# Altium PCB PCB1.PcbDoc
Units mm, origin at the board's own origin, x right, y up, seen from the top; angles counter-clockwise.
Board outline 60 x 60 mm, 4 copper layers (Top Layer 1, Layer 1, Layer 2, Bottom Layer 1), stack 0.603 mm thick; 63 components, 62 nets, 347 pads, 4 vias.
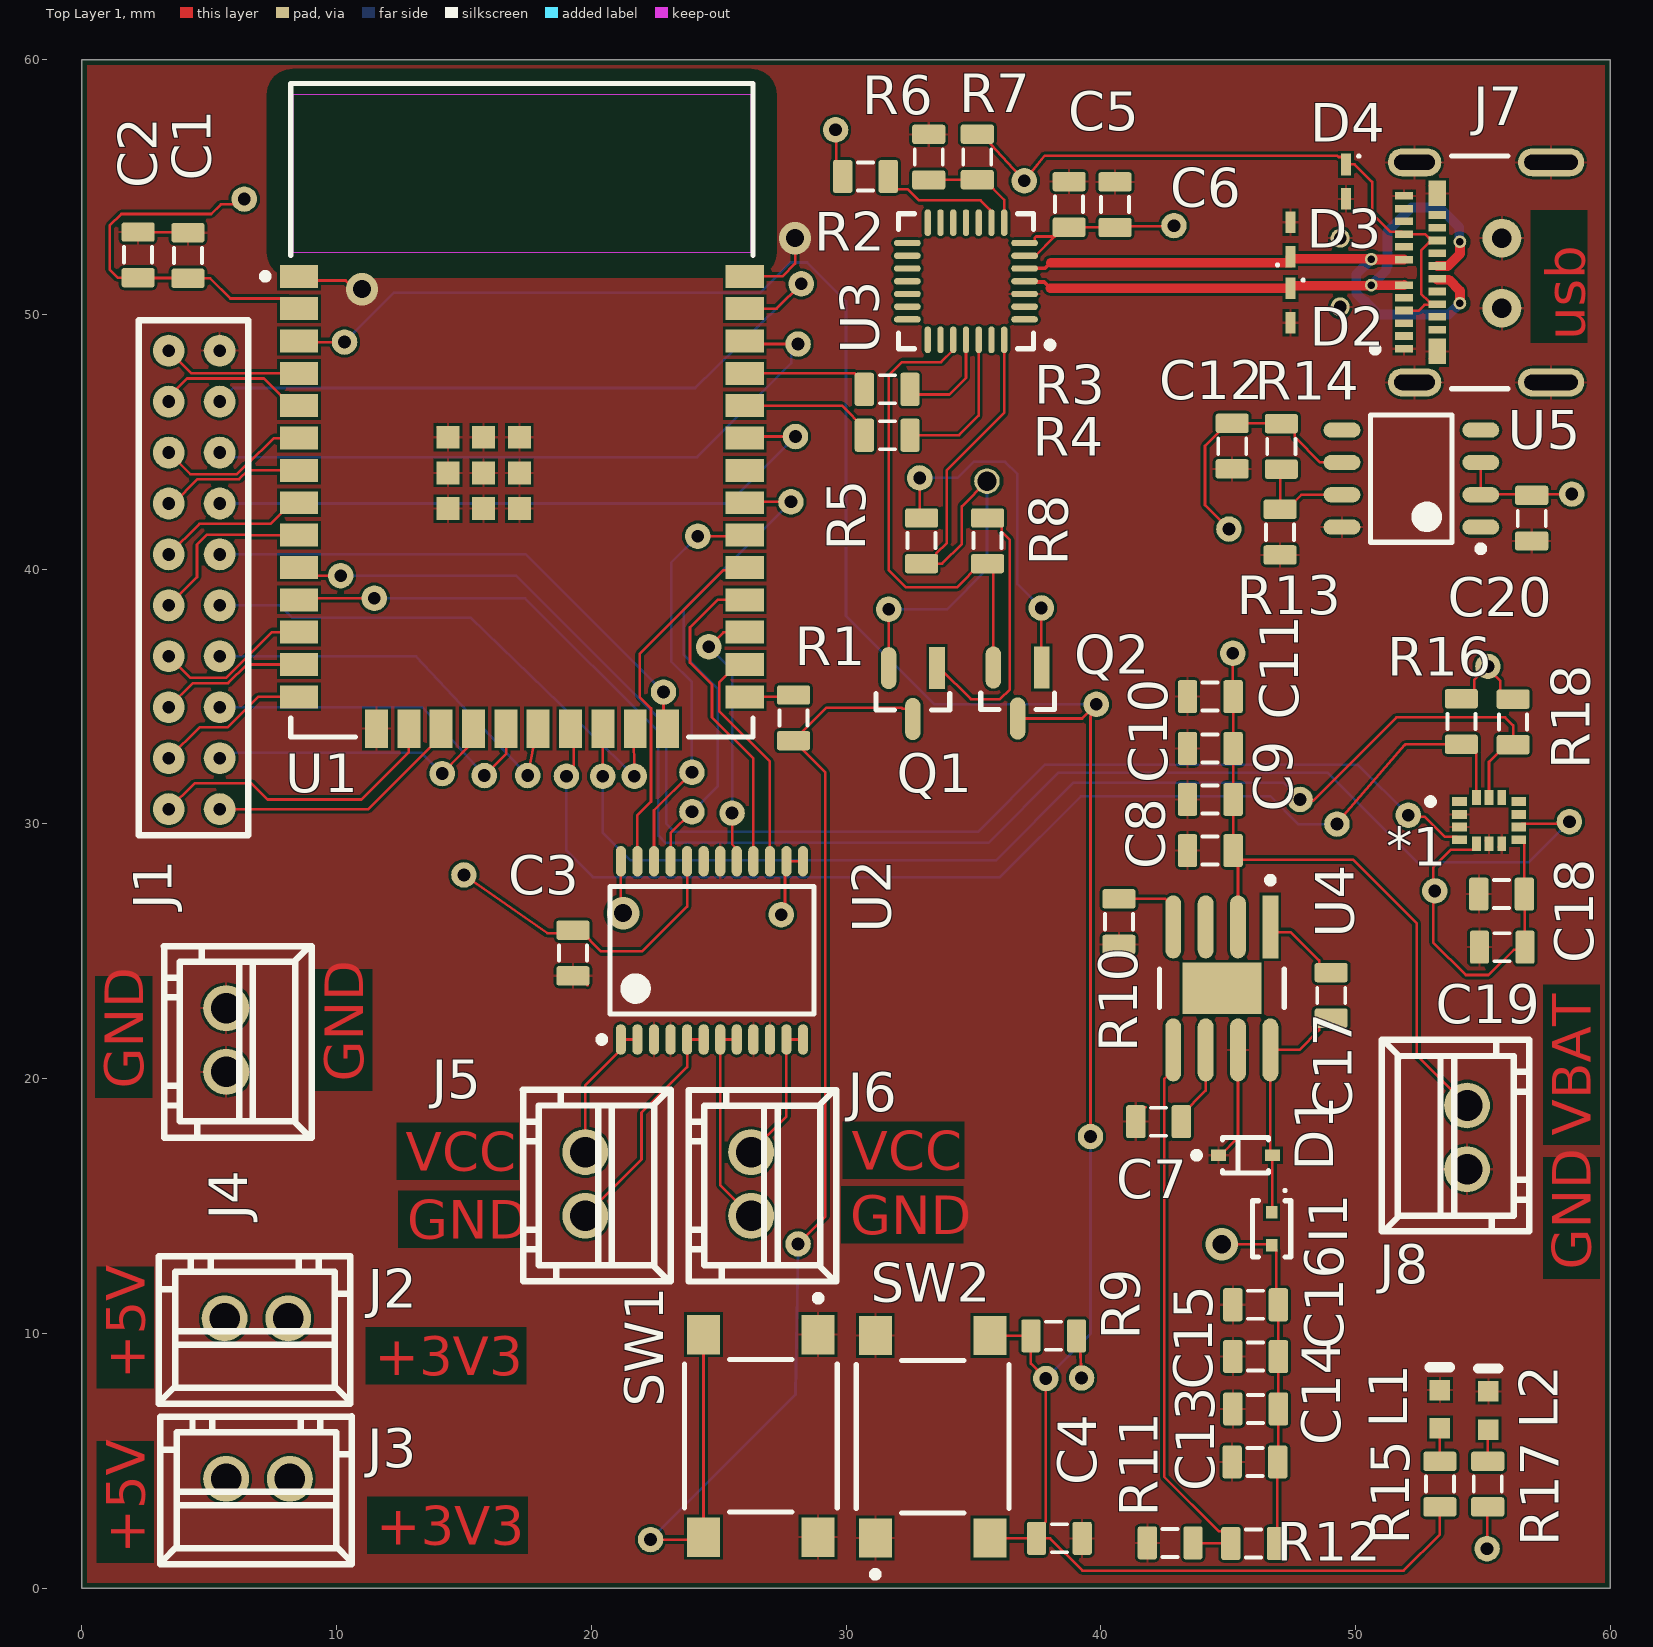
[diagram p0: Top Layer 1 view]
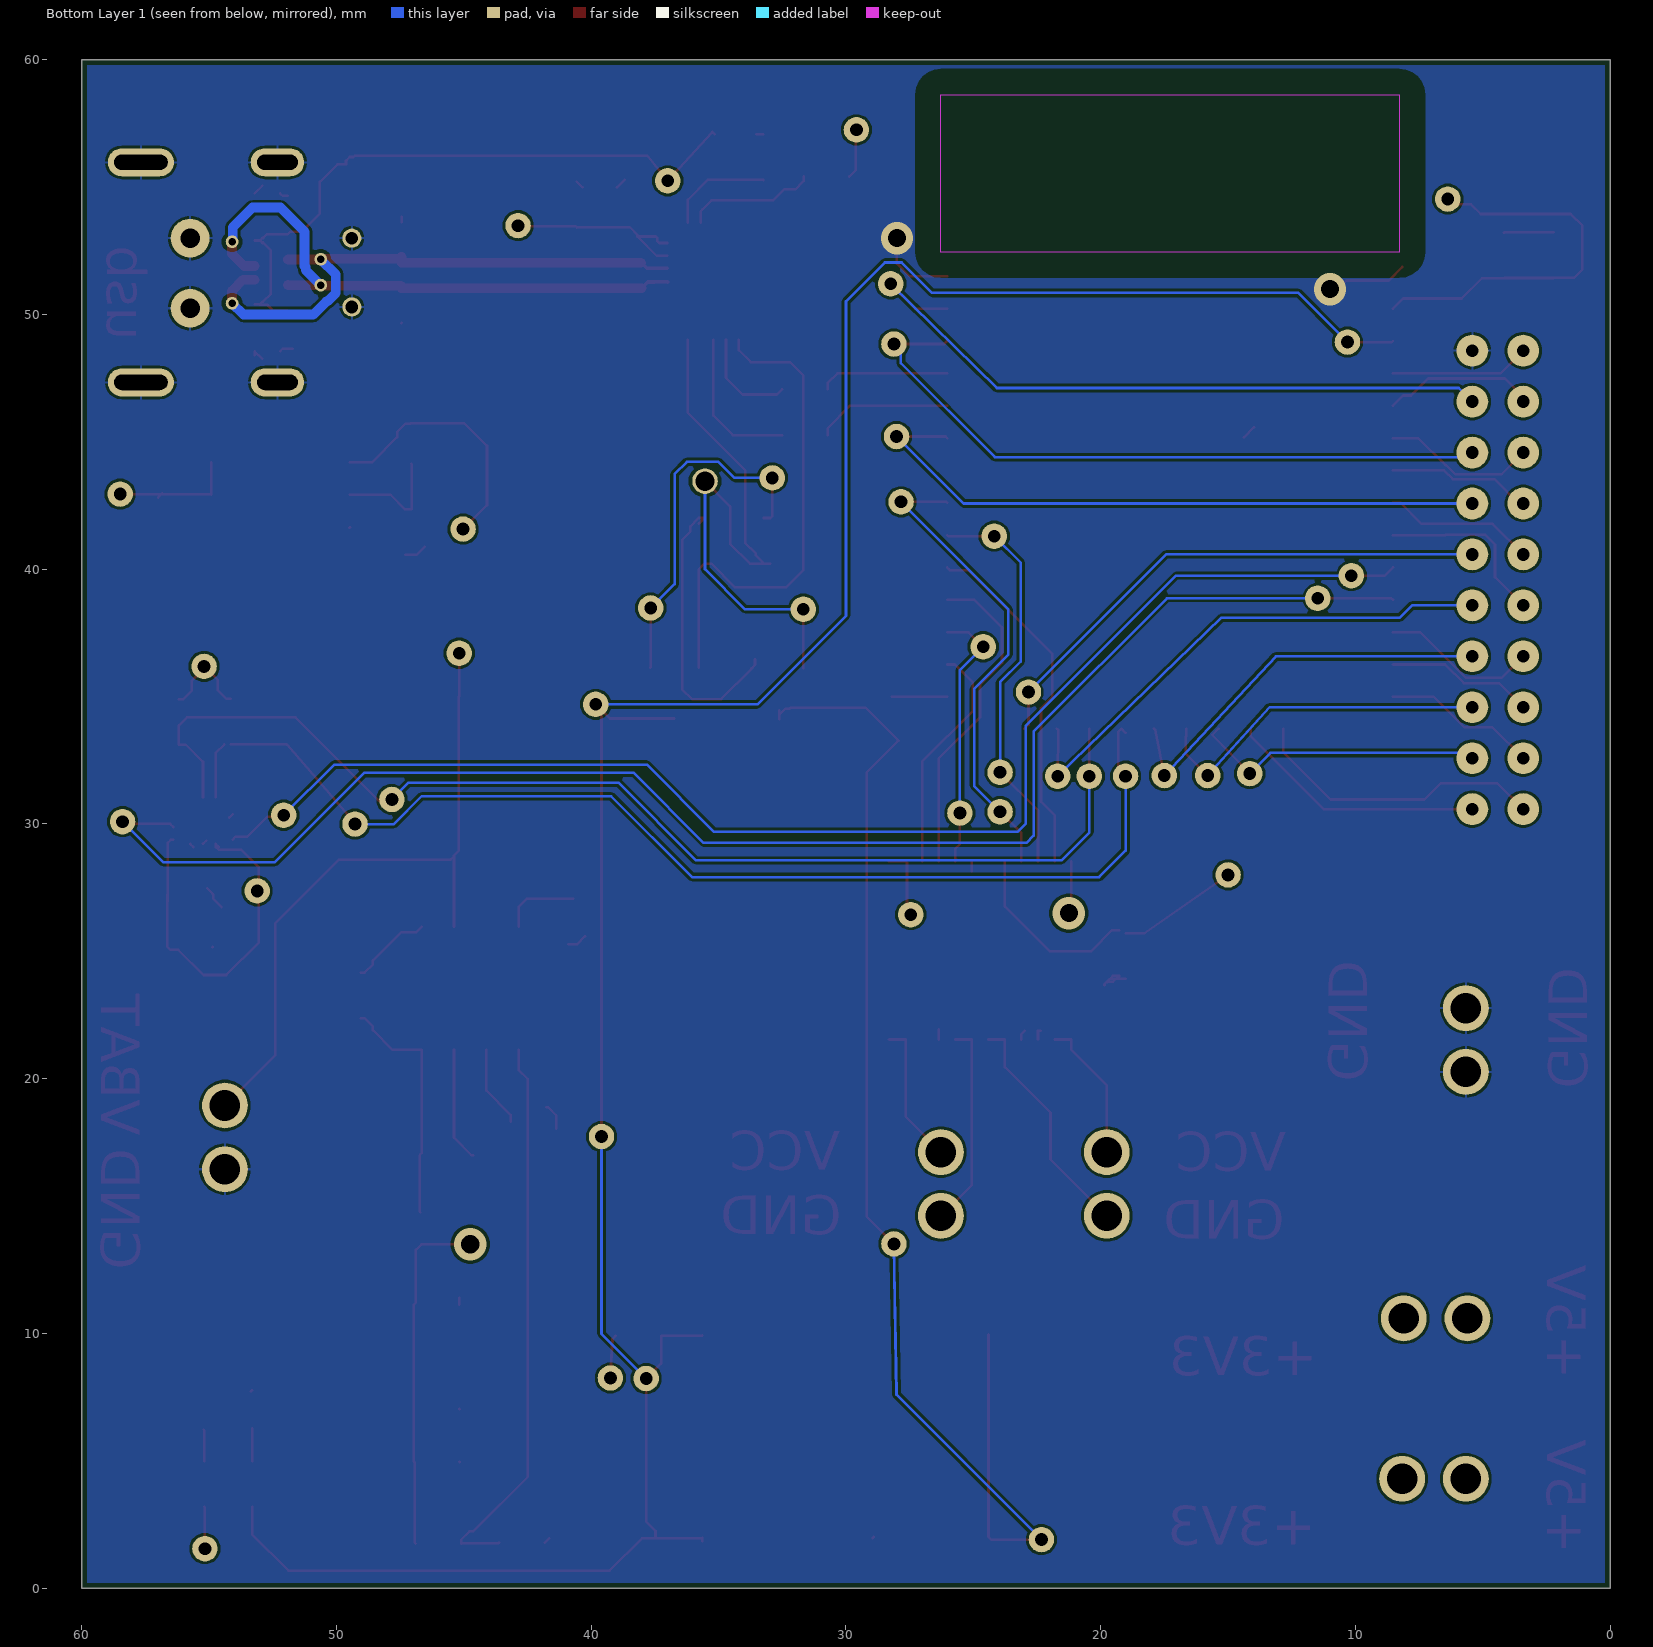
[diagram p1: Bottom Layer 1 view, seen from below]
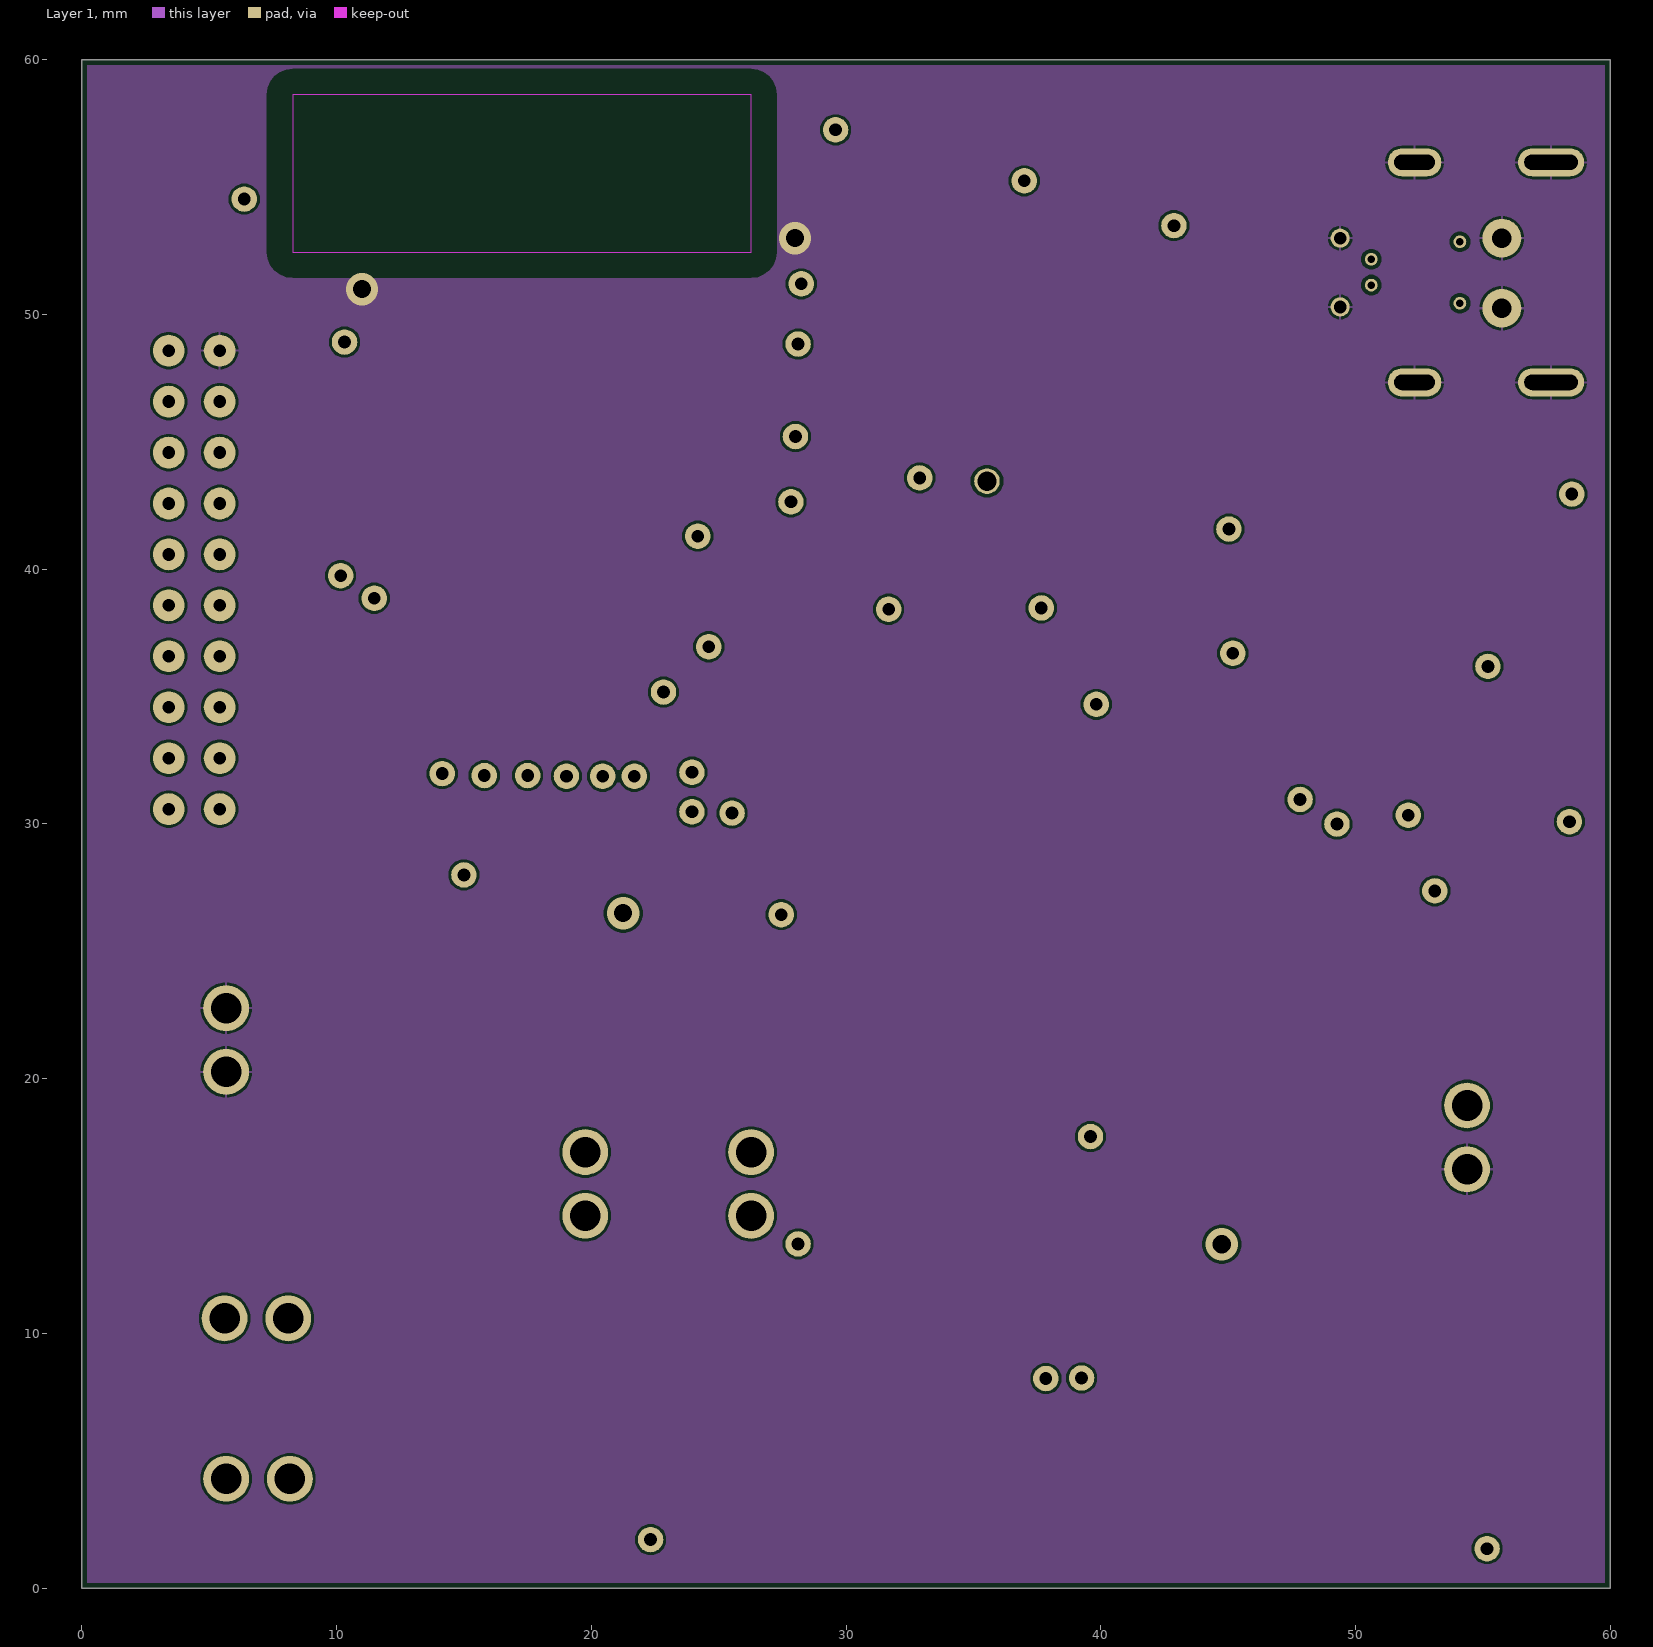
[diagram p2: Layer 1]
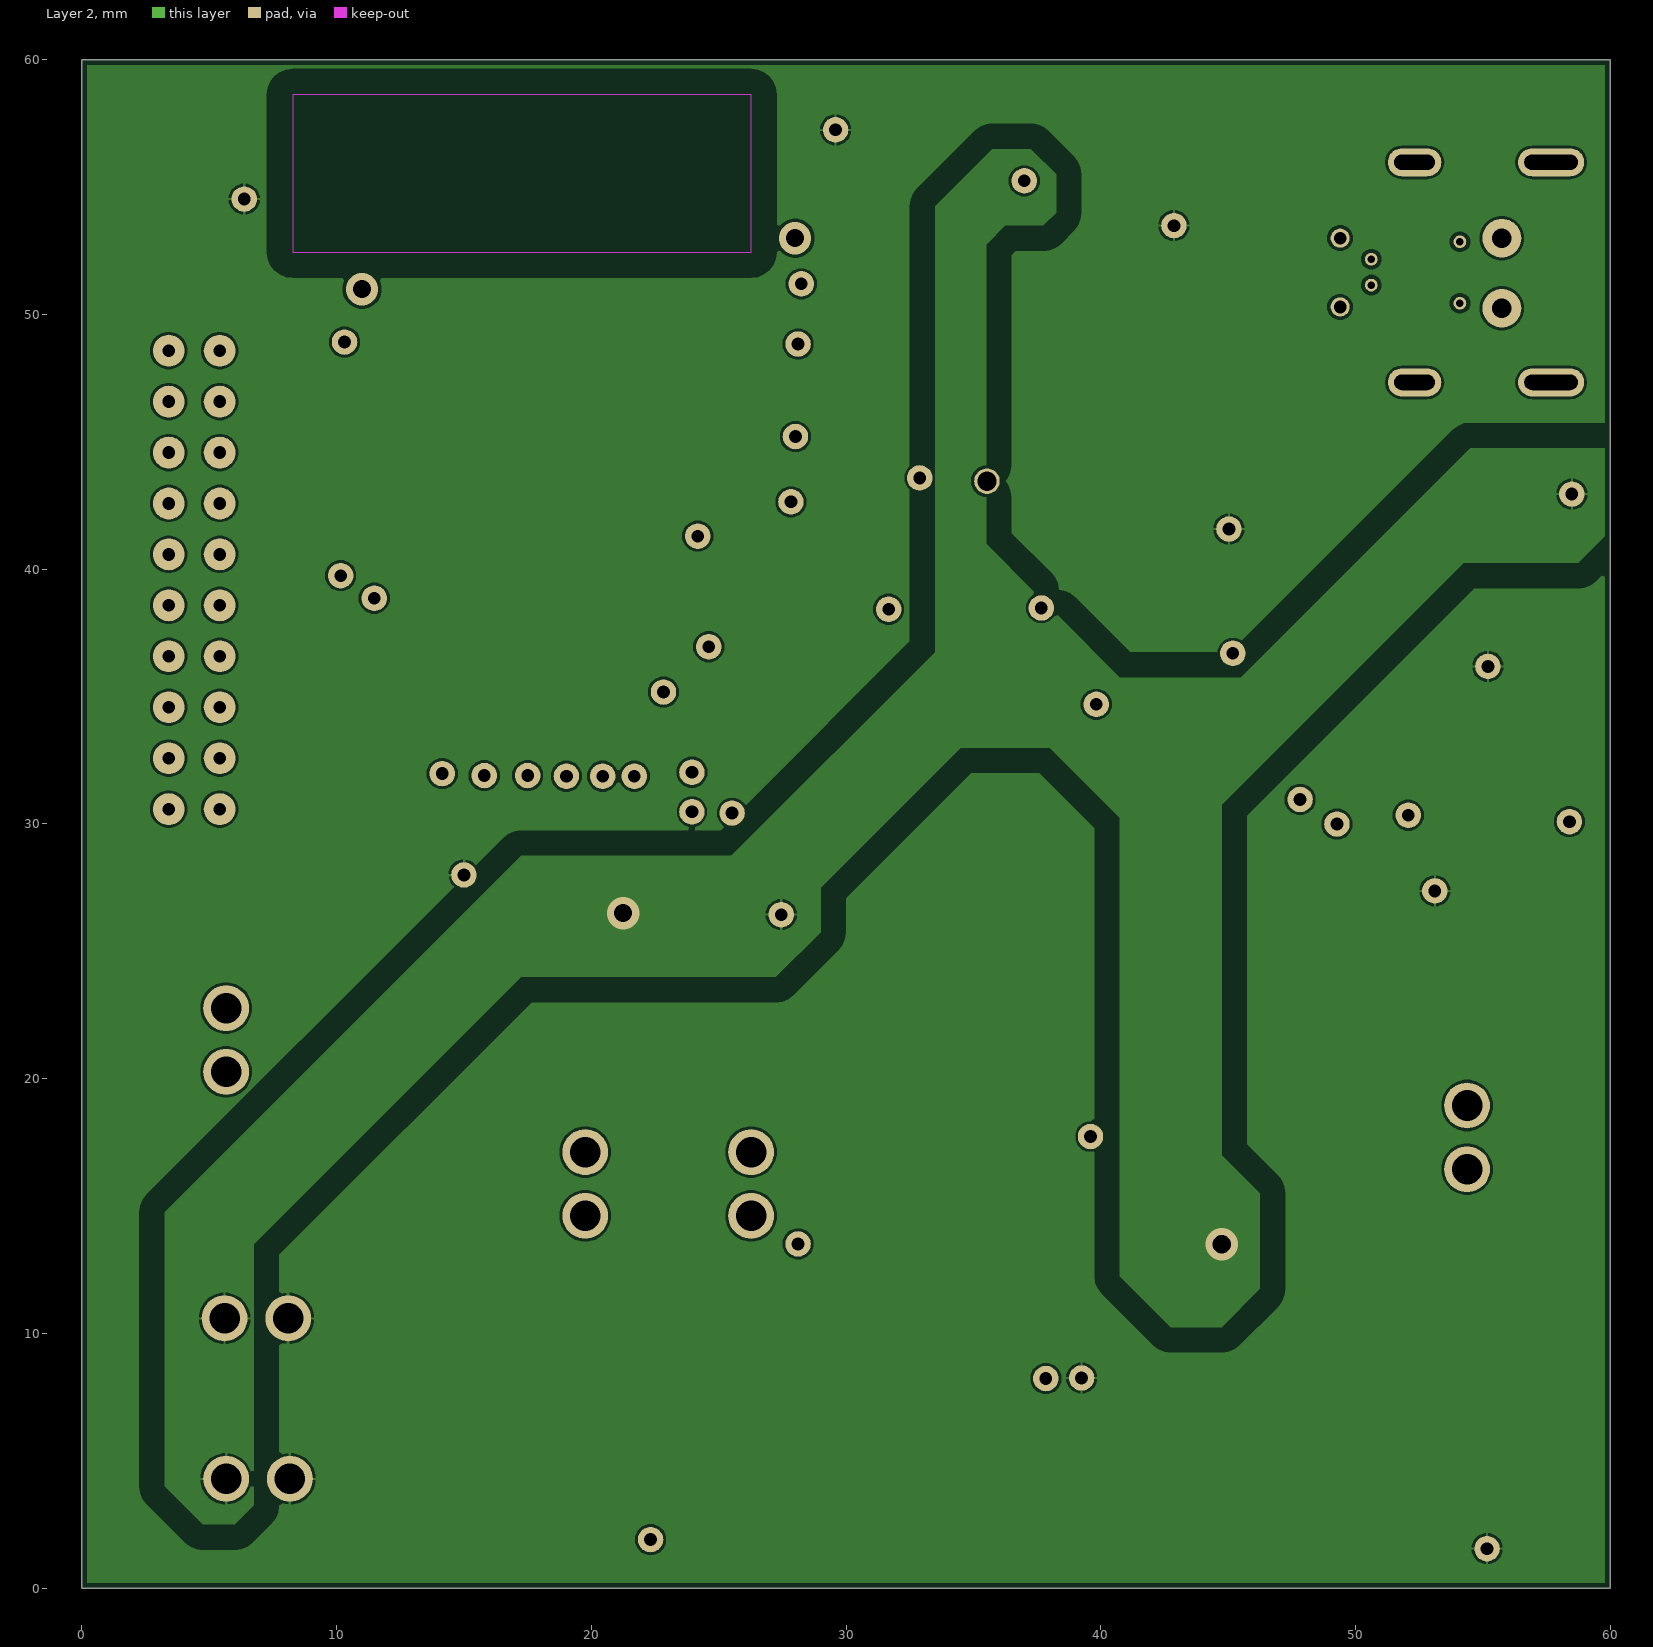
[diagram p3: Layer 2]
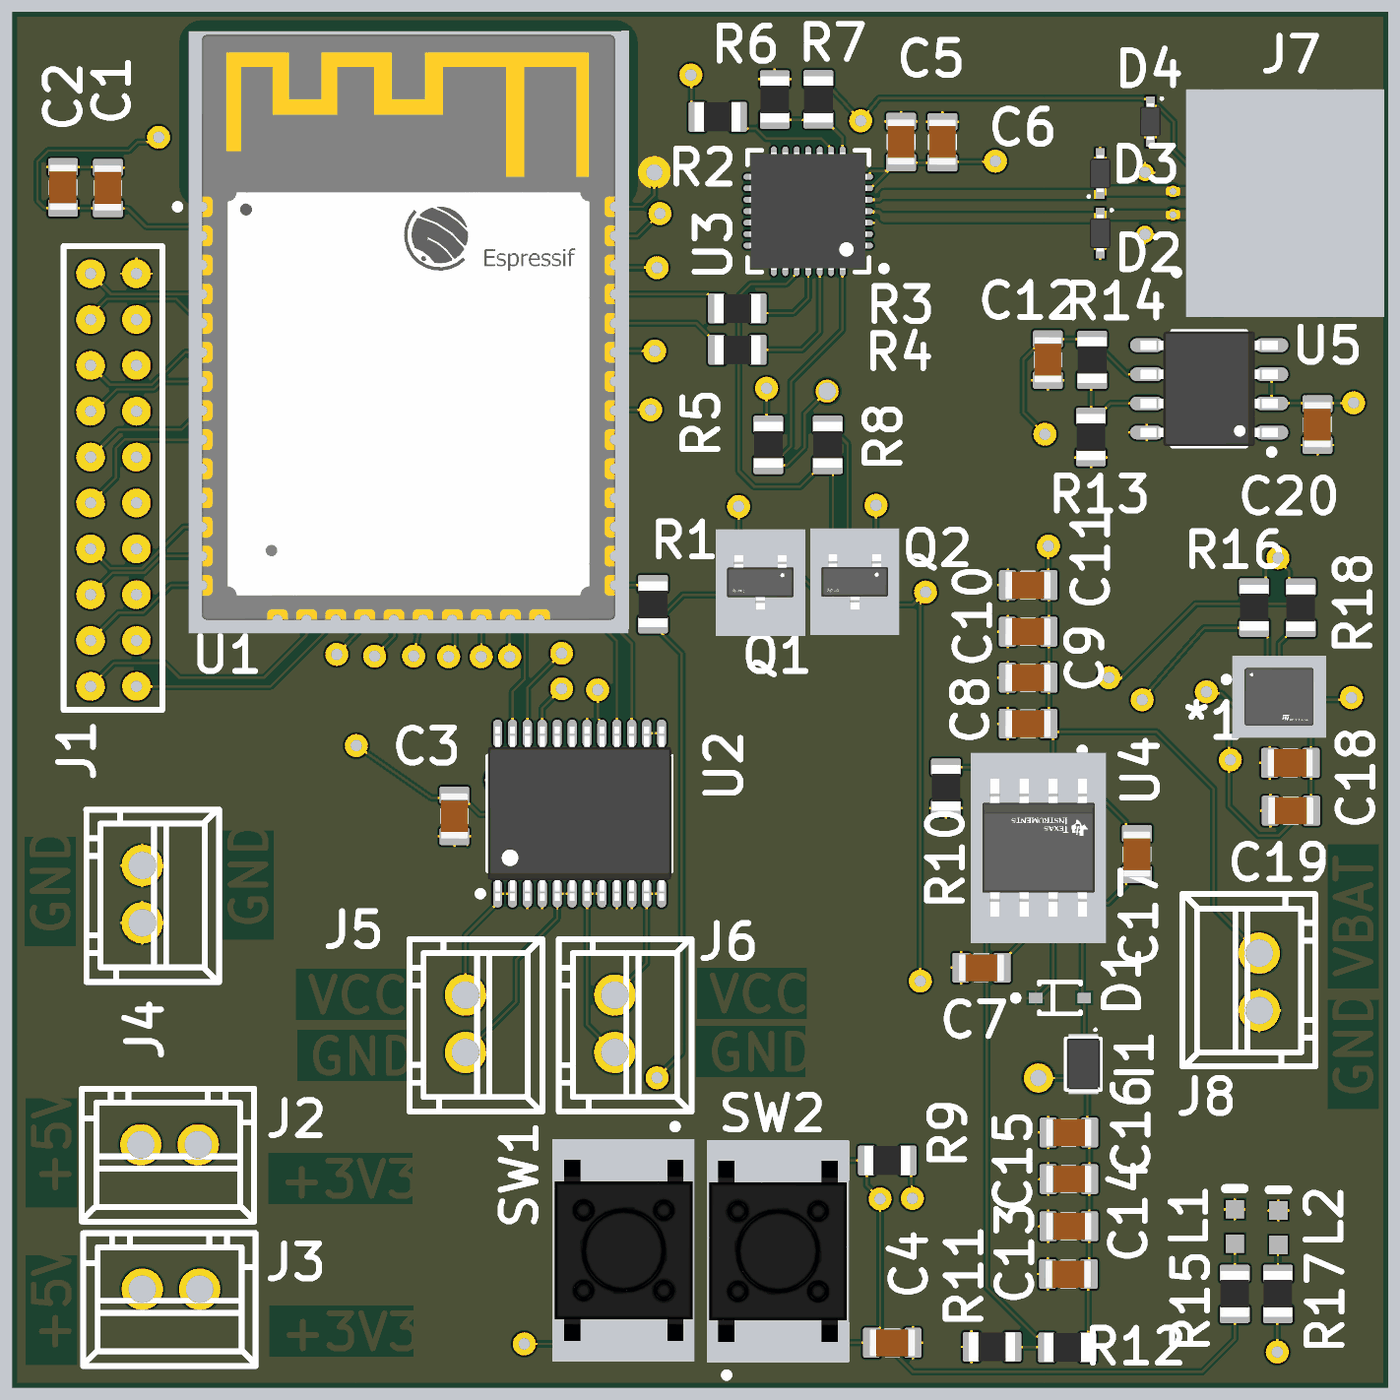
[diagram p4: 3D render of the assembled board from above, using the file's embedded part models]

## Layer stack, top to bottom
Top Solder: solder mask 0.0102, Solder Resist, Dk 3.5
Top Layer 1: signal copper 0.035
Dielectric 2: prepreg 0.0711, PP-006, Dk 4.1
Layer 1: signal copper 0.0356
Dielectric 1: dielectric 0.32, FR-4, Dk 4.8
Layer 2: signal copper 0.0356
Dielectric 3: prepreg 0.0711, PP-006, Dk 4.1
Bottom Layer 1: signal copper 0.035
Bottom Solder: solder mask 0.0102, Solder Resist, Dk 3.5

## Board outline
0,0 60,0 60,60 0,60

## Design rules (kind name [scope] priority, off if disabled: settings)
BoardOutlineClearance [All] p1: gap=0.2 ignorepadtopadclearanceinfootprint=FALSE
Clearance [All] p1: gap=0.102 ignorepadtopadclearanceinfootprint=TRUE except(0.127: Arc-Via Track-Via SMDPad-Via THPad-Via Via-Via Via-Fill Via-Poly Via-Region Via-Text; 0.25: Arc-Hole Track-Hole SMDPad-Hole THPad-Hole Via-Hole Fill-Hole Poly-Hole Region-Hole Text-Hole; 1: Fill-Fill Fill-Poly Fill-Region Poly-Poly Poly-Region Region-Region)
ComponentClearance [All] p1: gap=0.102 collisioncheckmode=3 verticalgap=0.102 showdistances=TRUE
DiffPairsRouting DiffPairsRouting_1 [All] p1: maxlimit=0.254 minlimit=0.254 mostfreqgap=0.254 toplayer_minwidth=0.381 toplayer_maxwidth=0.381 toplayer_prefwidth=0.381 midlayer1_minwidth=0.381 midlayer1_maxwidth=0.381 midlayer1_prefwidth=0.381 midlayer2_minwidth=0.381 midlayer2_maxwidth=0.381 midlayer2_prefwidth=0.381 bottomlayer_minwidth=0.381 bottomlayer_maxwidth=0.381 bottomlayer_prefwidth=0.381 maxuncoupledlength=12.7
DiffPairsRouting USB [InDifferentialPairClass('USB')] p2: maxlimit=0.23 minlimit=0.102 mostfreqgap=0.203 toplayer_minwidth=0.102 toplayer_maxwidth=0.3 toplayer_prefwidth=0.28 midlayer1_minwidth=0.102 midlayer1_maxwidth=0.3 midlayer1_prefwidth=0.28 midlayer2_minwidth=0.102 midlayer2_maxwidth=0.3 midlayer2_prefwidth=0.28 bottomlayer_minwidth=0.102 bottomlayer_maxwidth=0.3 bottomlayer_prefwidth=0.28 maxuncoupledlength=12.7
Height [All] p1: minheight=0 maxheight=1816.048 prefheight=12.7
HoleSize [All] p1: absolutevalues=TRUE maxlimit=6.3 minlimit=0.2 maxpercent=80.000 minpercent=20.000
HoleToHoleClearance [All] p1: gap=0.25 allowstackedmicrovias=FALSE
MinimumAnnularRing [All] p1: minimumring=0.076
MinimumSolderMaskSliver [All] p1: minsoldermaskwidth=0
PlaneClearance [All] p1: clearance=0.102
PlaneConnect PlaneConnectPowerPads [InPadClass('PowerPads')] p1: planeconnectstyle=Direct reliefexpansion=0.508 reliefentries=4 reliefconductorwidth=0.254 reliefairgap=0.254
PlaneConnect [All] p2: pad.planeconnectstyle=Relief pad.reliefexpansion=0.3 pad.reliefentries=4 pad.reliefconductorwidth=0.102 pad.reliefairgap=0.102 via.planeconnectstyle=Direct via.reliefexpansion=0.3 via.reliefentries=4 via.reliefconductorwidth=0.127 via.reliefairgap=0.127
PolygonConnect PolygonConnectPowerPads [All vs (InPadClass('PowerPads'))] p1: connectstyle=Direct reliefconductorwidth=0.254 reliefentries=4 polygonreliefangle="90 Angle" airgapwidth=0.254
PolygonConnect [All] p2: thpad.connectstyle=Relief thpad.reliefconductorwidth=0.102 thpad.reliefentries=4 thpad.polygonreliefangle="90 Angle" thpad.airgapwidth=0.102 smdpad.connectstyle=Relief smdpad.reliefconductorwidth=0.102 smdpad.reliefentries=4 smdpad.polygonreliefangle="90 Angle" smdpad.airgapwidth=0.102 via.connectstyle=Direct via.reliefconductorwidth=0.127 via.reliefentries=4 via.polygonreliefangle="90 Angle" via.airgapwidth=0.127
RoutingVias [All] p1: holewidth=0.2 width=0.45 viastyle="Through Hole" minholewidth=0.2 minwidth=0.45 maxholewidth=6.3 maxwidth=6.55
SilkToSilkClearance [All] p1: silktosilkclearance=0
SilkToSolderMaskClearance [IsPad] p1: minsilkscreentomaskgap=0.102 clearancetoexposedcopper=TRUE
SolderMaskExpansion [All] p1: expansion=0.075 istentingtop=FALSE
Width [All] p1: maxlimit=1816.048 minlimit=0.102 preferedwidth=0.102
20 further rules are at their usual default settings.

## Classes and differential pairs
differential pair class USB: USB
component class Controller: C1 C2 C5 C9 C16 D2 D3 J8 L1 L2 Q2 R6 R8 R9 R11 R12 R13 R14 R15 R18 SW2 U3 U5
component class power: C1 C5 C7 C9 C11 C15 C16 C19 C20 D1 I1 J8 R6 R11 R12 R13 R14 U4 U5
component class Peripherals: *1 C3 C5 C19 J5 J6 J7 J8 R11 R18 U2 U7
differential pair USB: +USB_P -USB_N

## Components (designator, comment, footprint, x,y, rotation, side; value= is the part's Value field where it differs from the comment)
*1 "LSM6DS3TR" LSM6DS3TR 55.246,30.156 r0 top (schematic designator *)
C1 "CAPA" Condo 2.184,52.349 r90 top (schematic designator C17)
C2 "CAPA" Condo 4.14,52.324 r90 top (schematic designator C16)
C3 "CAPA" Condo 19.304,24.932 r270 top (schematic designator C15)
C4 "CAPA" Condo 38.379,1.981 r0 top (schematic designator C20)
C5 "CAPA" Condo 38.735,54.331 r90 top (schematic designator C18)
C6 "CAPA" Condo 40.538,54.32 r90 top (schematic designator C19)
C7 "CAPA" Condo 42.266,18.288 r180 top (schematic designator C10)
C8 "CAPA" Condo 44.298,28.931 r180 top (schematic designator C5)
C9 "CAPA" Condo 44.298,30.937 r180 top (schematic designator C4)
C10 "CAPA" Condo 44.298,32.944 r180 top (schematic designator C3)
C11 "CAPA" Condo 44.298,34.976 r180 top (schematic designator C2)
C12 "CAPA" Condo 45.187,44.831 r270 top (schematic designator C11)
C13 "CAPA" Condo 46.05,4.928 r180 top (schematic designator C9)
C14 "CAPA" Condo 46.076,7.01 r180 top (schematic designator C8)
C15 "CAPA" Condo 46.076,9.068 r180 top (schematic designator C7)
C16 "CAPA" Condo 46.076,11.1 r180 top (schematic designator C6)
C17 "CAPA" Condo 49.073,23.266 r270 top (schematic designator C1)
C18 "CAPA" Condo 55.734,27.222 r180 top (schematic designator C13)
C19 "CAPA" Condo 55.76,25.139 r180 top (schematic designator C14)
C20 "CAPA" Condo 56.946,42.001 r270 top (schematic designator C12)
D1 "BAT760-7" BAT760-7 45.517,17.094 r0 top
D2 "LESD5D5.0CT1G" LESD5D5.0CT1G 47.447,50.354 r270 top
D3 "LESD5D5.0CT1G" LESD5D5.0CT1G 47.447,52.948 r90 top (schematic designator D4)
D4 "LESD5D5.0CT1G" LESD5D5.0CT1G 49.632,55.22 r270 top (schematic designator D3)
I1 "ILSB0805ER8R2K" ILSB0805ER8R2K 46.711,14.107 r270 top
J1 "Harwin M22-2521005" M22-2521005 3.41,48.584 r180 top (schematic designator J4)
J2 "XH-2A" XH-2A 6.783,10.118 r180 top (schematic designator J6)
J3 "XH-2A" XH-2A 6.846,3.819 r180 top (schematic designator J5)
J4 "XH-2A" XH-2A 6.138,21.451 r270 top (schematic designator J7)
J5 "XH-2A" XH-2A 20.235,15.8 r270 top (schematic designator J3)
J6 "XH-2A" XH-2A 26.746,15.799 r270 top (schematic designator J2)
J7 "12401610E4#2A" 105450-0101 55.658,51.658 r90 top (schematic designator J1)
J8 "XH-2A" XH-2A 53.908,17.766 r90 top
L1 "Led" LED 53.315,7.024 r90 top
L2 "Led" LED 55.22,6.973 r90 top
Q1 "SS8050-G" SS8050-G 32.649,35.144 r270 top (schematic designator Q2)
Q2 "SS8050-G" SS8050-G 36.764,35.169 r270 top (schematic designator Q1)
R1 "Resistor" Resistor 27.965,34.163 r270 top (schematic designator R8)
R2 "Resistor" Resistor 30.759,55.397 r180 top (schematic designator R11)
R3 "10K" Resistor 31.622,47.091 r0 top (schematic designator R17)
R4 "10K" Resistor 31.623,45.288 r0 top (schematic designator R18)
R5 "Resistor" Resistor 32.944,41.123 r90 top (schematic designator R12)
R6 "Resistor" Resistor 33.223,56.185 r90 top (schematic designator R10)
R7 "Resistor" Resistor 35.179,56.185 r270 top (schematic designator R9)
R8 "10K" Resistor 35.535,41.123 r90 top (schematic designator R14)
R9 "Resistor" Resistor 38.151,9.881 r180 top (schematic designator R13)
R10 "Resistor" Resistor 40.742,26.162 r270 top (schematic designator R2)
R11 "Resistor" Resistor 42.723,1.753 r180 top (schematic designator R3)
R12 "Resistor" Resistor 46,1.728 r180 top (schematic designator R1)
R13 "Resistor" Resistor 47.066,41.454 r270 top (schematic designator R5)
R14 "Resistor" Resistor 47.117,44.82 r270 top (schematic designator R4)
R15 "Resistor" Resistor 53.29,4.088 r90 top
R16 "Resistor" Resistor 54.184,34.018 r270 top (schematic designator R6)
R17 "Resistor" Resistor 55.169,4.089 r90 top (schematic designator R16)
R18 "Resistor" Resistor 56.217,34.003 r270 top (schematic designator R7)
SW1 "PTS645SM43SMTR92LFS" PTS645SM43SMTR92LFS 26.68,5.982 r270 top (schematic designator SW2)
SW2 "PTS645SM43SMTR92LFS" PTS645SM43SMTR92LFS 33.376,5.944 r90 top (schematic designator SW1)
U1 "ESP32-WROOM-32E-N4" ESP32-WROOM-32E 17.276,46.24 r0 top (schematic designator U4)
U2 "TB6612FNG" TB6612FNG 24.587,24.714 r90 top
U3 "CP2102N QFN28" cp2102 34.71,51.309 r180 top (schematic designator U5)
U4 "LMR14050" LMR14050 44.78,23.546 r270 top (schematic designator U3)
U5 "TPS7A7002DDAR" TPS7A7002DDAR 52.197,43.561 r180 top (schematic designator U1)

## Footprints (in the part's own frame and the unit in brackets; to place one, negate y for a bottom-side part, rotate by r counter-clockwise, add the part's x,y. Pads: shape width x height; smd on the part's side, far side on the other; paste and mask are expansions set on the pad)
105450-0101 [mm] "importé !"
  rrect100% 1.1x2.1 hole 1.6 slot 0.6 at 0 deg paste-2539.97 mask+0: 1(-4.32,3.335) 2(4.32,3.335)
  rrect100% 1.1x2.6 hole 2.1 slot 0.6 at 0 deg paste-2539.97 mask+0: 3(-4.32,-2.025) 4(4.32,-2.025)
  rect 0.3x0.7 smd paste+0 mask+0: A1(-3,3.745) A2(-2.5,3.745) A3(-2,3.745) A4(-1.5,3.745) A5(-1,3.745) A6(-0.5,3.745) A7(0.5,3.745) A8(1,3.745) A9(1.5,3.745) A10(2,3.745) A11(2.5,3.745) A12(3,3.745) B2(2.25,2.445) B3(1.75,2.445) B4(1.25,2.445) B5(0.75,2.445) B6(0.25,2.445) B7(-0.25,2.445) B8(-0.75,2.445) B9(-1.25,2.445) B10(-1.75,2.445) B11(-2.25,2.445)
  rect 1x0.7 smd paste+0 mask+0: B1(3.1,2.445) B12(-3.1,2.445)
  silkscreen extent -4.57,-0.33 4.57,5.01
BAT760-7 [mm]
  rect 0.59x0.45 smd paste+0 mask+0: 1(-0.885,-0.099) 2(1.225,-0.099)
  silkscreen extent -1.88,-0.8 1.07,0.6
Condo [mm]
  rrect25% 0.76x1.3 smd: 1(-0.9,-0.025) 2(0.89,-0.025)
  silkscreen extent -0.3,-0.58 0.3,0.53, body extent -1,-0.63 1,0.57, height 1.45
cp2102 [mm] "QFN, 28-Leads, Body 5,00x5,00mm, Pitch 0,50mm, Thermal Pad 3,13x3,13mm, IPC Medium Density"
  oval 1.05x0.25 smd: 1(-2.3,1.5) 2(-2.3,1) 3(-2.3,0.5) 4(-2.3,0) 5(-2.3,-0.5) 6(-2.3,-1) 7(-2.3,-1.5) 15(2.3,-1.5) 16(2.3,-1) 17(2.3,-0.5) 18(2.3,0) 19(2.3,0.5) 20(2.3,1) 21(2.3,1.5)
  oval 0.25x1.05 smd: 8(-1.5,-2.3) 9(-1,-2.3) 10(-0.5,-2.3) 11(0,-2.3) 12(0.5,-2.3) 13(1,-2.3) 14(1.5,-2.3) 22(1.5,2.3) 23(1,2.3) 24(0.5,2.3) 25(0,2.3) 26(-0.5,2.3) 27(-1,2.3) 28(-1.5,2.3)
  silkscreen extent -3.43,-2.65 2.65,2.65, body extent -2.55,-2.55 2.55,2.55, height 1
ESP32-WROOM-32E [mm]
  rect 1.5x0.9 smd paste+0 mask+0: 1(-8.75,5.262) 2(-8.75,3.992) 3(-8.75,2.722) 4(-8.75,1.452) 5(-8.75,0.182) 6(-8.75,-1.088) 7(-8.75,-2.358) 8(-8.75,-3.628) 9(-8.75,-4.898) 10(-8.75,-6.168) 11(-8.75,-7.438) 12(-8.75,-8.708) 13(-8.75,-9.978) 14(-8.75,-11.248) 25(8.75,-11.248) 26(8.75,-9.978) 27(8.75,-8.708) 28(8.75,-7.438) 29(8.75,-6.168) 30(8.75,-4.898) 31(8.75,-3.628) 32(8.75,-2.358) 33(8.75,-1.088) 34(8.75,0.182) 35(8.75,1.452) 36(8.75,2.722) 37(8.75,3.992) 38(8.75,5.262)
  rect 0.9x1.5 smd paste+0 mask+0: 15(-5.71,-12.498) 16(-4.44,-12.498) 17(-3.17,-12.498) 18(-1.9,-12.498) 19(-0.63,-12.498) 20(0.64,-12.498) 21(1.91,-12.498) 22(3.18,-12.498) 23(4.45,-12.498) 24(5.72,-12.498)
  rect 0.9x0.9 smd paste+0 mask+0: 39(-2.9,-3.858) 39(-2.9,-2.458) 39(-2.9,-1.058) 39(-1.5,-3.858) 39(-1.5,-2.458) 39(-1.5,-1.058) 39(-0.1,-3.858) 39(-0.1,-2.458) 39(-0.1,-1.058)
  Keep-Out Layer region: -9,6.207 9,6.207 9,12.397 -9,12.397
  Keep-Out Layer region: -9,6.207 9,6.207 9,12.397 -9,12.397
  silkscreen extent -10.2,-12.82 9.08,12.83, body extent -9.6,-13.35 9.6,12.93, height 0.25
ILSB0805ER8R2K [mm] "Molded Diode, 2-Leads, Body 2,00x1,25mm, IPC Medium Density"
  rect 0.48x0.45 smd: 1(-0.65,0) 2(0.65,0)
  silkscreen extent -1.55,-0.75 1.1,0.75, body extent -1.32,-0.72 1.32,0.72, height 1.4
LED [mm]
  rect 0.8x0.8 smd: 1(-0.75,0) 2(0.75,0)
  silkscreen extent 1.65,-0.4 1.65,0.4, body extent -0.8,-0.4 0.8,0.4, height 0.65
LESD5D5.0CT1G [mm] "SODFL, 2-Leads, Body 0,80x1,60mm, IPC Medium Density"
  rect 0.85x0.4 smd: 1(-0.675,0) 2(0.675,0)
  silkscreen extent -1.05,0.45 -0.95,0.55, body extent -0.8,-0.45 0.8,0.45, height 0.6
LMR14050 [mm]
  rect 2.474x0.622 smd paste+0 mask+0: 1(-2.416,1.88)
  rrect100% 2.474x0.622 smd paste+0 mask+0: 2(-2.416,0.61) 3(-2.416,-0.66) 4(-2.416,-1.93) 5(2.416,-1.93) 6(2.416,-0.66) 7(2.416,0.61) 8(2.416,1.88)
  rect 2.025x3.1 smd paste-1000 mask+0: 9(0,-0.025)
  silkscreen extent -4.37,-2.48 0.75,2.42, body extent -4.15,-2.98 4.15,2.92, height 0.25
LSM6DS3TR [mm]
  rect 0.575x0.35 smd paste+0 mask+0: 1(-1.162,0.725) 2(-1.162,0.225) 3(-1.162,-0.275) 4(-1.162,-0.775) 8(1.162,-0.775) 9(1.162,-0.275) 10(1.162,0.225) 11(1.162,0.725)
  rect 0.35x0.575 smd paste+0 mask+0: 5(-0.5,-0.938) 6(0,-0.938) 7(0.5,-0.938) 12(0.5,0.887) 13(0,0.887) 14(-0.5,0.887)
  silkscreen extent -2.42,0.6 -2.17,0.85, body extent -2.05,-1.83 2.05,1.77, height 0.25
M22-2521005 [mm]
  round 1.25 hole 0.5: 1(0,0) 2(0,2) 3(0,4) 4(0,6) 5(0,8) 6(0,10) 7(0,12) 8(0,14) 9(0,16) 10(0,18) 11(-2,18) 12(-2,16) 13(-2,14) 14(-2,12) 15(-2,10) 16(-2,8) 17(-2,6) 18(-2,4) 19(-2,2) 20(-2,0)
  silkscreen extent -3.13,-1.2 1.17,19.02
PTS645SM43SMTR92LFS [mm]
  rect 1.55x1.3 smd paste+0 mask+0: 1(-3.975,2.225) 2(3.975,2.225) 3(-3.975,-2.275) 4(3.975,-2.275)
  silkscreen extent -5.52,-3.03 3,2.97, body extent -4.85,-3.13 4.85,3.07, height 0.25
Resistor [mm]
  rrect25% 0.76x1.3 smd: 1(-0.9,-0.025) 2(0.89,-0.025)
  silkscreen extent -0.3,-0.58 0.3,0.53, body extent -1,-0.65 1,0.6, height 0.6
SS8050-G [mm]
  rect 1.657x0.612 smd paste+0 mask+0: 1(-0.976,0.925)
  rrect100% 1.657x0.612 smd paste+0 mask+0: 2(-0.976,-0.975) 3(1.026,-0.025)
  silkscreen extent 0.03,-1.48 0.68,1.42, body extent -2.3,-1.98 2.35,1.92, height 0.25
TB6612FNG [mm]
  oval 1.2x0.4 smd: 1(-3.175,3.425) 2(-3.175,2.775) 3(-3.175,2.125) 4(-3.175,1.475) 5(-3.175,0.825) 6(-3.175,0.175) 7(-3.175,-0.475) 8(-3.175,-1.125) 9(-3.175,-1.775) 10(-3.175,-2.425) 11(-3.175,-3.075) 12(-3.175,-3.725) 13(3.825,-3.725) 14(3.825,-3.075) 15(3.825,-2.425) 16(3.825,-1.775) 17(3.825,-1.125) 18(3.825,-0.475) 19(3.825,0.175) 20(3.825,0.825) 21(3.825,1.475) 22(3.825,2.125) 23(3.825,2.775) 24(3.825,3.425)
  silkscreen extent -3.3,-4.15 2.83,4.3, body extent -3.47,-4.15 4.13,3.85, height 1.6
TPS7A7002DDAR [mm] "SOIC, 8-Leads, Body 4,90x3,90mm, Pitch 1,27mm, Thermal Pad 0,00x0,00mm, IPC Medium Density"
  oval 1.45x0.6 smd: 1(-2.725,1.905) 2(-2.725,0.635) 3(-2.725,-0.635) 4(-2.725,-1.905) 5(2.725,-1.905) 6(2.725,-0.635) 7(2.725,0.635) 8(2.725,1.905)
  silkscreen extent -2.85,-2.5 1.6,2.88, body extent -3,-2.5 3,2.5, height 1.7
XH-2A [mm]
  round 1.8 hole 1.199 paste-2539.97 mask+0.051: 1(-1.32,-0.474) 2(1.182,-0.474)
  silkscreen extent -3.76,-2.92 3.76,2.88

## Part data
C1: "0.1uF"
C2: "22uF"
C3 C6 C8 C12 C17 C18 C19 C20: "100nF"
C4: "1uF"
C5: "4.7UF"
C7: "20nF"
C9 C10: "2.2uF"
C11 C13 C14 C15 C16: "47uF"
R1: "22"
R2: "1K"
R3 R4 R8: library part Resistor
R5 R9 R15 R17: "10K"
R6: "47K"
R7: "22K"
R10: "84K5"
R11: "17K8"
R12: "100K"
R13: "30K1"
R14: "169K"
R16 R18: "4K7"

## Free pads (board coordinates)
  round 1 hole 0.5: 23(6.375,54.534) 23(37,55.25) 24(29.591,57.252) 24(42.875,53.492) 24(47.828,30.963) 24(49.276,29.997) 24(52.077,30.346) 24(53.118,27.374) 24(55.201,36.188) 24(58.401,30.092) 27(10.312,48.92) 28(22.327,1.905) 28(28.118,13.513) 28(37.846,8.23) 28(39.599,17.729) 28(39.827,34.696) 28(45.034,41.58) 28(45.187,36.703) 28(55.169,1.549) 29(32.893,43.586) 31(37.668,38.481) 32(10.16,39.751) 32(11.481,38.862) 33(28.118,48.844) 35(23.952,30.48) 35(27.838,42.647) 36(28.016,45.212) 37(23.952,32.029) 37(24.181,41.3) 39(24.613,36.957) 39(25.527,30.429) 39(27.457,26.441) 42(31.674,38.43) 43(14.148,31.979) 44(15.799,31.902) 48(19.025,31.877) 48(20.447,31.877) 48(21.692,31.877) 50(17.501,31.902) 51(22.835,35.179) 52(28.245,51.206) 53(15,28) (39.25,8.25) pg(58.496,42.951)
  round 0.5 hole 0.3: 24(50.622,51.156) 24(50.622,52.172) 24(54.102,50.444) 24(54.102,52.857)
  round 1 hole 0.762: 30(35.535,43.459)
  round 0.75 hole 0.5: 56(49.4,50.3) 56(49.4,53)
  round 1.524 hole 0.762: 56(55.75,53) 57(55.75,50.25)

## Via types
v1: diameter 1.27, hole 0.711, Top Layer 1 to Bottom Layer 1, 4 vias

## Nets (pads, with @x,y where several pads share a name; then routed paths per layer and width w, separated by ;. In a path a pad name is that pad's centre, name@x,y a point inside that pad or via, vN(x,y) a via of type N, cw(c..) or ccw(c..) an arc to the next point about the centre after c; other vN are vias at no path point)
+3V3: *1.5 *1.8 C1.1 C2.1 C3.1 C5.1 C6.1 C12.1 C18.1 C19.1 J2.1 J3.1 pad.23@6.375,54.534 pad.24@29.591,57.252 pad.24@42.875,53.492 pad.24@53.118,27.374 pad.24@55.201,36.188 pad.28@45.034,41.58 pad.28@55.169,1.549 pad.53 pad. R2.2 R9.1 R14.1 R16.1 R17.1 R18.1 U1.2 U2.20 U3.6 U3.7 U5.6 | length 68.9
  Top Layer 1 w0.102: pad.23@6.375,54.534 6.172,54.331 5.461,54.331 5.08,53.95 1.549,53.95 1.092,53.492 1.092,51.765 1.408,51.449 C1.1 2.222,51.437 4.153,51.437 C2.1 5.04,51.424 5.833,50.632 8.127,50.632 U1.2 ; pad.53 18.275,25.716 C3.1@19.025,25.716 ; C3.1 19.549,25.832 20.38,25 22,25 23.762,26.762 U2.20 ; pad.24@29.591,57.252 29.613,57.23 29.613,55.679 R2.2 ; U3.6 37.432,52.309 C5.1@38.188,53.065 ; U3.7 37.335,52.809 37.403,52.878 37.403,53.006 37.463,53.065 C5.1@38.188,53.065 ; R9.1 39.167,9.79 pad. 39.361,8.417 pad.@39.361,8.459 ; pad.24@42.621,53.467 40.61,53.467 C6.1 40.558,53.425 38.766,53.425 C5.1 38.49,53.431 38.188,53.129 C5.1@38.188,53.065 ; pad.28@45.034,41.58 44.094,42.52 44.094,44.842 44.983,45.731 C12.1 45.167,45.726 47.086,45.726 R14.1 47.298,45.72 47.624,45.394 47.624,45.188 48.616,44.196 U5.6 ; pad.24@53.059,27.594 53.059,28.305 53.735,28.981 54.622,28.981 54.746,29.106 *1.5 *1.5@54.622,29.094 ; pad.24@53.061,27.592 53.118,27.374 53.055,27.31 53.055,25.355 54.337,24.072 55.226,24.072 56.217,25.063 56.533,25.063 56.647,25.177 56.647,27.234 C18.1 ; R16.1 54.338,34.918 54.664,35.244 54.664,35.651 55.201,36.188 55.201,36.103 55.688,35.617 55.688,35.229 56.013,34.903 R18.1 ; pad.28@55.169,1.549 55.169,3.164 R17.1 ; *1.8 56.51,29.381 56.634,29.256 C18.1 ; C18.1@56.634,26.977 C18.1
+5V: C13.1 C14.1 C15.1 C16.1 C20.1 I1.2 J2.2 J3.2 pad.39@27.457,26.441 pad.pg R12.1 U2.13 U2.14 U2.24 U5.2 U5.3 | length 23.8
  Top Layer 1 w0.102: U2.24 21.162,26.588 v1(21.25,26.5) ; pad.39@27.457,26.441 27.605,26.589 27.605,28.482 U2.14 U2.13 ; v1(44.75,13.5) 46.668,13.5 46.885,13.283 46.885,11.216 C16.1 C15.1 C14.1 46.963,7.023 46.963,4.965 C13.1 46.925,4.928 46.925,1.777 R12.1 ; U5.3 U5.2 54.935,42.939 C20.1@56.883,42.939 ; C20.1@56.838,42.984 C20.1@56.883,42.939 ; C20.1@57.005,42.817 C20.1@56.883,42.939 ; pad.pg 58.483,42.939 C20.1@56.883,42.939
EXT_5V: D4.1 J7.A4 J7.A9 J7.B4 J7.B9 pad.23@37,55.25 R7.1 | length 25.9
  Top Layer 1 w0.102: R7.1 35.245,57.175 37,55.25 37.795,56.236 49.291,56.236 49.339,56.187 49.482,56.187 49.632,56.038 D4.1 49.973,55.895 50.657,55.21 50.657,53.965 51.365,53.257 51.814,53.257 J7.A9 52.734,53.158 52.885,53.007 52.914,53.007 52.984,52.937 J7.B4@52.984,52.908 ; J7.A4 52.488,50.158 52.711,50.381 J7.B9@53.013,50.381 ; J7.B4@52.889,52.834 52.578,52.523 52.578,50.81 52.88,50.507 52.914,50.507 52.995,50.426 52.995,50.408 J7.B9 ; J7.B4@52.914,52.809 53.013,52.908 J7.B4
GND: *1.2 *1.3 *1.6 *1.7 C1.2 C2.2 C3.2 C4.2 C5.2 C6.2 C7.2 C8.2 C9.2 C10.2 C11.2 C12.2 C13.2 C14.2 C15.2 C16.2 C18.2 C19.2 C20.2 D1.1 D2.2 D3.2 D4.2 J1.20 J4.1 J4.2 J7.1 J7.2 J7.3 J7.4 J7.A1 J7.A12 J7.B1 J7.B12 J8.1 L1.2 L2.2 pad.56 pad.57 R6.2 R10.2 R11.2 R13.2 SW1.1 SW1.2 SW2.1 SW2.2 U1.1 U1.15 U1.38 U1.39 U2.3 U2.4 U2.9 U2.10 U2.18 U3.3 U4.7 U5.8 | length 27.2
  Top Layer 1 w0.102: C1.2 2.222,53.227 4.153,53.227 C2.2 ; U1.1@8.162,51.867 8.691,51.337 10.356,51.337 10.694,51 v1(11,51) ; U1.39@13.977,45.582 U1.39@14.376,45.182 ; C3.2@19.025,23.926 C3.2@19.279,23.926 ; C3.2@19.594,23.926 C3.2@19.395,23.926 ; C3.2@19.733,23.787 19.78,23.787 19.851,23.716 C3.2@19.851,23.669 ; U2.3@22.361,21.888 22.462,21.888 U2.3 ; U2.4@22.974,21.888 23.112,21.751 U2.4 ; U2.18@25.062,28.139 U2.18 ; U1.38 27.502,51.502 28,52 v1(28,53) ; U2.9 U2.9@26.362,21.939 ; SW1.2 SW1.2@28.943,1.969 ; R6.2 R6.2@33.518,57.075 ; C5.2@38.685,55.296 C5.2 C5.2@38.99,54.991 ; R10.2@40.244,25.598 40.57,25.272 R10.2 R10.2@40.895,25.272 ; C6.2@40.344,54.991 C6.2 ; C7.2@41.376,18.043 C7.2 41.376,18.559 41.701,18.885 41.758,18.885 ; R11.2@41.654,1.956 R11.2 ; D1.1 44.702,16.995 45.39,17.683 U4.7 ; C13.2 C13.2 C13.2@45.173,4.965 ; C14.2@45.173,7.023 C14.2 ; C16.2 C16.2@45.186,11.395 ; R13.2@46.537,40.89 46.862,40.564 R13.2 R13.2@47.311,40.564 ; D2.2 D2.2@47.461,49.665 ; D3.2 D3.2@47.447,53.848 ; U5.8 U5.8@49.505,41.623 ; J7.A1@51.713,48.658 J7.A1 52.113,48.658 J7.A1@52.212,48.559 ; J7.2@51.823,55.978 J7.2 J7.2@52.212,55.867 ; J7.A12 52.113,54.658 J7.A12@52.212,54.757 ; J7.1@52.212,47.449 J7.1 52.453,47.338 J7.1@52.914,47.799 ; J7.B12@52.914,48.259 J7.B12 J7.B12@53.213,48.408 ; J7.B1@52.914,55.057 J7.B1 ; L1.2 L1.2@53.365,7.723 ; *1.2 *1.2@54.207,30.256 ; C18.2@54.518,26.742 54.844,27.068 C18.2 ; C19.2@54.857,25.177 C19.2 ; C18.2@54.857,27.234 C18.2 ; C18.2@55.078,27.481 C18.2 ; *1.6@55.122,29.342 *1.6 ; *1.7@55.622,29.094 *1.7 ; C3.2@19.279,23.926 C3.2@19.395,23.926 ; C3.2@19.279,23.926 C3.2 ; C3.2 C3.2@19.395,23.926 ; C3.2 19.519,24.042 19.753,23.808 19.513,23.808 C3.2@19.395,23.926
  Bottom Layer 1 w0.102: J4.2 5.706,20.227 J4.2@5.706,19.927
Net*_4: *1.4 pad.24@52.077,30.346 pad.32@10.16,39.751 U1.10 | length 54.4
  Top Layer 1 w0.102: U1.10 8.847,39.751 pad.32@10.16,39.751 ; pad.24@52.077,30.346 52.143,30.279 52.729,30.279 53.504,29.505 53.959,29.505 *1.4
  Bottom Layer 1 w0.102: pad.32@10.16,39.751 17.043,39.751 22.936,33.858 22.936,30.023 23.266,29.693 35.179,29.693 37.821,32.334 50.088,32.334 pad.24@52.077,30.346
Net*_9: *1.9 pad.24@58.401,30.092 pad.32@11.481,38.862 U1.11 | length 61.6
  Top Layer 1 w0.102: U1.11 8.586,38.862 pad.32@11.481,38.862 ; *1.9 56.532,30.005 58.314,30.005 pad.24@58.401,30.092
  Bottom Layer 1 w0.102: pad.32@11.481,38.862 17.399,38.862 22.631,33.63 22.631,29.54 22.911,29.261 35.585,29.261 38.329,32.004 48.92,32.004 52.426,28.499 56.808,28.499 pad.24@58.401,30.092
Net*_13: *1.13 pad.24@47.828,30.963 pad.48@20.447,31.877 R18.2 U1.22 | length 46.9
  Top Layer 1 w0.102: pad.48@20.456,31.635 U1.22 ; pad.24@47.828,30.963 48.328,30.912 51.605,34.188 55.878,34.188 56.192,33.875 R18.2 55.922,33.113 55.246,32.437 *1.13
  Bottom Layer 1 w0.102: pad.48@20.447,31.877 20.447,29.667 21.539,28.575 35.89,28.575 38.938,31.623 47.168,31.623 pad.24@47.828,30.963
Net*_14: *1.14 pad.24@49.276,29.997 pad.48@19.025,31.877 R16.2 U1.21 | length 46.1
  Top Layer 1 w0.102: pad.48@19.025,31.877 19.304,32.309 19.304,33.624 U1.21 U1.21@19.025,33.581 ; pad.24@49.276,29.997 49.647,30.466 49.677,30.496 51.934,33.096 51.966,33.128 R16.2 ; R16.2@54.406,33.128 54.746,32.788 *1.14
  Bottom Layer 1 w0.102: pad.48@19.025,31.877 19.025,28.956 20.066,27.915 36.043,27.915 39.218,31.09 46.66,31.09 47.752,29.997 pad.24@49.276,29.997
NetC1_1: C17.1 U4.1 | length 3.2
  Top Layer 1 w0.102: U4.1 46.866,25.756 47.459,25.756 48.575,24.639 48.575,24.492 48.901,24.166 C17.1
NetC1_2: C17.2 D1.2 I1.1 U4.8 | length 9.4
  Top Layer 1 w0.102: I1.1 46.742,14.789 D1.2 46.66,17.077 U4.8 47.801,21.13 48.575,21.904 48.575,22.051 48.901,22.376 C17.2
NetC10_1: C7.1 U4.6 | length 3.2
  Top Layer 1 w0.102: C7.1 43.166,18.583 44.12,19.537 U4.6
NetC20_1: C4.1 pad.27 pad.28@37.846,8.23 pad.28@39.599,17.729 pad.28@39.827,34.696 Q2.3 R9.2 R15.1 SW2.3 SW2.4 U1.3 | length 107.6
  Top Layer 1 w0.102: U1.3 8.568,48.92 pad.27 ; SW2.3@35.651,1.844 SW2.3 35.663,1.956 C4.1 ; SW2.4 35.664,9.906 R9.2 37.261,8.815 37.846,8.23 37.846,2.617 37.479,2.25 C4.1 ; Q2.3 39.274,34.143 39.827,34.696 39.827,34.453 39.599,34.225 pad.28@39.599,17.729 ; R15.1 53.315,2.108 51.892,0.686 39.282,0.686 38.012,1.956 C4.1
  Bottom Layer 1 w0.102: pad.27 12.243,50.851 26.619,50.851 27.813,52.045 28.473,52.045 30,50.518 30,38.174 33.477,34.696 pad.28@39.827,34.696 ; pad.28@37.846,8.23 39.599,9.982 pad.28@39.599,17.729
NetJ2_1: J6.1 U2.11 U2.12 | length 5.6
  Top Layer 1 w0.102: J6.1 27.662,18.508 U2.11 U2.12
NetJ2_2: J6.2 U2.7 U2.8 | length 8.1
  Top Layer 1 w0.102: U2.8 U2.7 25.062,15.827 J6.2
NetJ3_1: J5.1 U2.1 U2.2 | length 5.6
  Top Layer 1 w0.102: J5.1 19.761,19.738 21.162,21.139 U2.1 U2.2
NetJ3_2: J5.2 U2.5 U2.6 | length 9.2
  Top Layer 1 w0.102: J5.2 21.971,16.828 21.971,18.669 23.762,20.46 U2.5 U2.6
NetJ4_1: J1.1 U1.4 | length 5.5
  Top Layer 1 w0.102: J1.1 4.301,47.692 U1.4
NetJ4_2: J1.2 U1.5 | length 6
  Top Layer 1 w0.102: J1.2 3.41,46.768 4.131,47.489 7.146,47.489 7.814,46.822 8.127,46.822 U1.5
NetJ4_3: J1.3 U1.6 | length 6.1
  Top Layer 1 w0.102: J1.3 4.255,43.739 6.088,43.739 6.435,44.086 6.468,44.086 7.535,45.152 U1.6
NetJ4_4: J1.4 U1.7 | length 5.7
  Top Layer 1 w0.102: J1.4 3.595,42.584 4.547,43.536 6.172,43.536 6.519,43.882 U1.7
NetJ4_5: J1.5 U1.8 | length 6
  Top Layer 1 w0.102: J1.5 4.61,41.783 7.397,41.783 8.226,42.612 U1.8
NetJ4_6: J1.6 U1.9 | length 7
  Top Layer 1 w0.102: J1.6 4.521,39.695 4.521,40.97 4.912,41.361 6.448,41.361 6.467,41.342 U1.9
NetJ4_7: J1.7 U1.12 | length 6.2
  Top Layer 1 w0.102: J1.7 4.256,35.738 5.664,35.738 7.458,37.532 U1.12
NetJ4_8: J1.8 U1.13 | length 5.8
  Top Layer 1 w0.102: J1.8 4.359,35.533 5.746,35.533 6.476,36.262 U1.13
NetJ4_9: J1.9 U1.14 | length 6.1
  Top Layer 1 w0.102: J1.9 4.633,33.806 5.732,33.806 6.918,34.992 U1.14
NetJ4_10: J1.10 U1.16 | length 11.8
  Top Layer 1 w0.102: J1.10 4.424,31.598 6.655,31.598 7.29,30.963 10.973,30.963 12.836,32.826 U1.16
NetJ4_11: J1.11 U1.17 | length 10.2
  Top Layer 1 w0.102: J1.11 11.247,30.584 14.106,33.442 U1.17
NetJ4_12: J1.12 pad.43 U1.18 | length 11.6
  Top Layer 1 w0.102: pad.43 15.621,33.497 U1.18
  Bottom Layer 1 w0.102: J1.12 5.618,32.791 13.335,32.791 pad.43
NetJ4_13: J1.13 pad.44 U1.19 | length 13.8
  Top Layer 1 w0.102: pad.44 16.662,32.766 16.662,33.426 16.646,33.442 U1.19
  Bottom Layer 1 w0.102: J1.13 13.372,34.584 pad.44
NetJ4_14: J1.14 pad.50 U1.20 | length 16
  Top Layer 1 w0.102: pad.50 17.856,33.683 U1.20
  Bottom Layer 1 w0.102: J1.14 13.124,36.584 pad.50
NetJ4_15: J1.15 pad.48@21.692,31.877 U1.23 | length 20.9
  Top Layer 1 w0.102: pad.48@21.692,31.877 21.666,33.683 U1.23
  Bottom Layer 1 w0.102: J1.15 7.772,38.584 8.256,38.1 15.263,38.1 pad.48@21.692,31.877
NetJ4_16: J1.16 pad.51 U1.24 | length 21.2
  Top Layer 1 w0.102: pad.51 22.835,33.904 U1.24
  Bottom Layer 1 w0.102: J1.16 17.43,40.584 pad.51
NetJ4_17: J1.17 pad.36 U1.33 | length 25.7
  Top Layer 1 w0.102: U1.33 26.086,45.212 pad.36
  Bottom Layer 1 w0.102: J1.17 25.388,42.584 pad.36
NetJ4_18: J1.18 pad.33 U1.36 | length 27
  Top Layer 1 w0.102: U1.36 26.144,48.844 pad.33
  Bottom Layer 1 w0.102: J1.18 5.721,44.584 5.905,44.399 24.155,44.399 27.846,48.089 27.846,48.572 pad.33
NetJ4_19: J1.19 pad.52 U1.37 | length 27.3
  Top Layer 1 w0.102: U1.37 27.271,50.232 pad.52
  Bottom Layer 1 w0.102: J1.19 5.944,47.117 24.079,47.117 pad.52
NetL1_1: L1.1 R15.2 | length 1.3
  Top Layer 1 w0.102: R15.2 L1.1
NetL2_1: L2.1 R17.2 | length 1.3
  Top Layer 1 w0.102: R17.2 55.194,6.197 L2.1
NetNF1_1: U3.11
NetNF2_1: pad.28@22.327,1.905 pad.28@28.118,13.513 Q1.3 R1.2 SW1.3 SW1.4 | length 50.6
  Top Layer 1 w0.102: pad.28@22.327,1.905 24.304,1.905 SW1.4 SW1.3 ; pad.28@28.118,13.513 29.192,14.598 29.192,32.022 29.101,32.112 R1.2 29.237,34.569 32.173,34.569 32.225,34.518 32.388,34.518 32.624,34.282 Q1.3 Q1.3@32.624,34.473
  Bottom Layer 1 w0.102: pad.28@22.327,1.905 28.016,7.595 pad.28@28.118,13.513
NetQ1_1: pad.29 pad.31 Q2.1 R5.2 | length 14.2
  Top Layer 1 w0.102: pad.29 32.893,42.088 R5.2 R5.2@33.239,42.013 ; pad.31 37.668,36.165 Q2.1
  Bottom Layer 1 w0.102: pad.29 34.373,43.586 35.008,44.221 36.246,44.221 36.728,43.739 36.728,39.421 pad.31
NetQ1_2: Q2.2 R8.1 U3.24 | length 19.7
  Top Layer 1 w0.102: U3.24 34.21,48.609 33.734,48.133 32.207,48.133 31.674,47.6 31.674,39.98 32.36,39.294 34.361,39.294 35.29,40.223 R8.1 35.789,39.994 Q2.2
NetQ2_1: Q1.1 R8.2 | length 11.4
  Top Layer 1 w0.102: Q1.1@33.574,36.474 33.574,36.251 33.711,36.113 33.686,36.113 34.9,34.9 36.043,34.9 36.432,35.289 36.432,41.156 36.108,41.48 36.108,41.687 35.782,42.013 R8.2 R8.2@35.775,41.797
NetQ2_2: pad.30 pad.42 Q1.2 R5.1 U3.28 | length 25.1
  Top Layer 1 w0.102: Q1.2 pad.42 ; R5.1 R5.1@33.215,40.223 ; pad.30 34.547,42.472 34.547,40.999 33.771,40.223 R5.1@33.215,40.223 ; U3.28 36.21,46.142 33.96,43.891 33.96,41.035 33.541,40.616 33.541,40.548 R5.1@33.215,40.223
  Bottom Layer 1 w0.102: pad.42 33.96,38.43 35.535,40.005 pad.30
NetR1_2: R11.1 R12.2 U4.5 | length 22.2
  Top Layer 1 w0.102: U4.5 42.85,20.344 42.494,19.988 42.494,4.369 44.638,2.225 44.785,2.225 45.11,1.9 R12.2 45.098,1.765 43.635,1.765 R11.1
NetR2_1: R10.1 U4.4 | length 3
  Top Layer 1 w0.102: R10.1 42.535,27.062 42.85,26.747 U4.4
NetR4_2: R13.1 R14.2 U5.7 | length 4.5
  Top Layer 1 w0.102: R14.2@47.067,44.144 47.054,44.131 47.054,42.367 R13.1 47.311,42.354 47.883,42.926 U5.7
NetR8_1: R1.1 U1.25 | length 2.2
  Top Layer 1 w0.102: U1.25 26.035,35.001 R1.1@28.194,35.001
NetR9_2: R6.1 R7.2 U3.8 | length 4.2
  Top Layer 1 w0.102: R6.1 33.253,55.29 35.149,55.29 R7.2 35.424,55.295 36.21,54.508 U3.8
NetR11_1: R2.1 U3.9 | length 5.2
  Top Layer 1 w0.102: R2.1 31.659,55.244 31.985,54.918 32.425,54.918 32.86,54.483 35.281,54.483 35.638,54.126 35.638,54.122 35.71,54.05 U3.9
NetR17_1: R3.1 U1.35 | length 5.1
  Top Layer 1 w0.102: U1.35 30.342,47.692 30.722,47.312 R3.1
NetR17_2: R3.2 U3.25 | length 4
  Top Layer 1 w0.102: R3.2 32.715,46.863 34.061,46.863 34.71,47.512 U3.25
NetR18_1: R4.1 U1.34 | length 5.3
  Top Layer 1 w0.102: U1.34 29.834,46.422 30.723,45.533 R4.1
NetR18_2: R4.2 U3.26 | length 6
  Top Layer 1 w0.102: R4.2 34.443,45.263 35.21,46.031 U3.26
NetU2_15: U1.26 U2.15 | length 9.1
  Top Layer 1 w0.102: U1.26 25.726,36.262 25.019,35.555 25.019,34.442 27.012,32.449 U2.15
NetU2_16: U1.28 U2.16 | length 12.8
  Top Layer 1 w0.102: U1.28 24.959,38.802 23.876,37.719 23.876,36.335 24.74,35.471 24.74,34.188 26.362,32.566 U2.16
NetU2_17: pad.39@24.613,36.957 pad.39@25.527,30.429 U1.27 U2.17 | length 10.8
  Top Layer 1 w0.102: pad.39@24.613,36.957 25.183,37.528 26.021,37.528 U1.27 ; U2.17@25.655,28.596 U2.17 25.712,29.02 25.527,29.205 25.527,30.429 pad.39@25.655,30.301
  Bottom Layer 1 w0.102: pad.39@24.613,36.957 25.527,36.043 pad.39@25.527,30.429
NetU2_21: pad.35 U1.31 U2.21 | length 19
  Top Layer 1 w0.102: U2.21 23.112,29.64 pad.35@23.952,30.48 ; U1.31 26.06,42.647 pad.35@27.838,42.647
  Bottom Layer 1 w0.102: pad.35@23.952,30.48 24.968,31.496 24.968,35.306 23.622,36.652 23.622,38.43 pad.35@27.838,42.647
NetU2_22: pad.37 U1.30 U2.22 | length 16
  Top Layer 1 w0.102: U2.22 22.462,30.539 pad.37@23.952,32.029 ; pad.37@24.181,41.3 25.984,41.3 U1.30
  Bottom Layer 1 w0.102: pad.37@23.952,32.029 23.952,35.567 23.139,36.38 23.139,40.259 pad.37@24.181,41.3
NetU2_23: U1.29 U2.23 | length 14.1
  Top Layer 1 w0.102: U2.23 21.812,30.346 22.344,30.878 22.344,34.54 21.895,34.989 21.895,36.678 25.183,39.966 25.92,39.966 U1.29
USB_N: D3.1 J7.A7 J7.B7 pad.24@50.622,52.172 pad.24@54.102,50.444 U3.5 | length 23
  Top Layer 1 w0.15: U3.5@37.017,51.816 37.816,51.816 38.039,52.039
  Top Layer 1 w0.381: 38.039,52.039 47.438,52.039 47.447,52.048 D3.1 ; D3.1@47.457,52.194 50.599,52.194 50.622,52.172 50.629,52.165 51.906,52.165 J7.A7 ; J7.B7@53.213,51.368 53.667,51.368 54.102,50.932 pad.24@54.102,50.444
  Bottom Layer 1 w0.381: pad.24@50.622,52.172 50.032,51.581 50.032,50.848 50.359,50.521 50.394,50.521 50.914,50 53.658,50 pad.24@54.102,50.444
USB_P: D2.1 J7.A6 J7.B6 pad.24@50.622,51.156 pad.24@54.102,52.857 U3.4 | length 23.2
  Top Layer 1 w0.15: U3.4@37.01,51.275 37.026,51.29 37.5,51.29 37.516,51.275 37.782,51.275 38.029,51.029
  Top Layer 1 w0.381: 38.029,51.029 D2.1 47.457,51.038 47.457,51.133 50.599,51.133 50.622,51.156 50.624,51.157 51.912,51.157 J7.A6 ; J7.B6 53.626,51.908 54.102,52.384 pad.24@54.102,52.857
  Bottom Layer 1 w0.381: pad.24@50.622,51.156 51.213,51.746 51.213,51.864 51.257,51.909 51.257,53.257 52.2,54.2 53.3,54.2 54.079,53.421 54.079,52.88 pad.24@54.102,52.857
VBAT: C8.1 C9.1 C10.1 C11.1 J8.2 pad.28@45.187,36.703 U4.2 | length 26.9
  Top Layer 1 w0.102: pad.28@45.187,36.703 45.187,35.012 C11.1 C10.1 C9.1 C8.1 C8.1@45.39,28.763 ; U4.2 C8.1@45.39,28.763 ; J8.2 52.4,20.93 52.4,26.111 49.911,28.6 45.523,28.6 45.39,28.734 C8.1@45.39,28.763
pads on no net: *1.1 *1.10 *1.11 *1.12 J7.A2 J7.A3 J7.A5 J7.A8 J7.A10 J7.A11 J7.B2 J7.B3 J7.B5 J7.B8 J7.B10 J7.B11 U1.32 U2.19 U3.1 U3.2 U3.10 U3.12 U3.13 U3.14 U3.15 U3.16 U3.17 U3.18 U3.19 U3.20 U3.21 U3.22 U3.23 U3.27 U4.3 U4.9 U5.1 U5.4 U5.5

## Polygon pours and split planes (outlines as drawn)
GND on Bottom Layer 1 "GND_L04_P001" (solid, pour order 1): 0,0 60,0 60,60 0,60
+5V on Layer 2 "+5V_L03_P036" (solid, pour order 36): 35.75,56.5 37.25,56.5 38.25,55.5 38.25,54 37.75,53.5 36.25,53.5 35.5,52.75 35.5,41 40.75,35.75 45.5,35.75 54.5,44.75 60,44.75 60,41.5 58.75,40.25 54.25,40.25 44.75,30.75 44.75,17 46.25,15.5 46.25,11.75 44.75,10.25 43.25,10.25 43.25,10.75 43.25,10.25 42.75,10.25 40.75,12.25 40.75,30.25 38,33 34.5,33 29,27.5 29,25.75 27.25,24 17.25,24 6.75,13.5 6.75,3.25 6,2.5 4.75,2.5 3.25,4 3.25,14.75 17.25,28.75 25.5,28.75 33.5,36.75 33.5,54.25
+3V3 on Layer 2 "+3V3_L03_P037" (solid, pour order 37): 0,0 60,0 60,60 0,60
GND on Layer 1 "GND_L02_P039" (solid, pour order 39): 0,0 0,60 60,60 60,0
GND on Top Layer 1 "GND_L01_P038" (solid, pour order 38): 0,0 60,0 60,60 0,60

## Other copper
Top Layer 1:
  text "usb" at 59,49 h1.52 r90
  text "GND" at 11.049,19.888 h1.52 r90
  text "GND" at 2.413,19.609 h1.52 r90
  text "VBAT" at 59.246,17.754 h1.52 r90
  text "VCC" at 30.226,16.434 h1.52
  text "VCC" at 12.725,16.383 h1.52
  text "GND" at 30.175,13.894 h1.52
  text "GND" at 12.776,13.716 h1.52
  text "GND" at 59.246,12.504 h1.52 r90
  text "+3V3" at 11.506,8.357 h1.52
  text "+5V" at 2.464,8.204 h1.52 r90
  text "+3V3" at 11.557,1.702 h1.52
  text "+5V" at 2.464,1.346 h1.52 r90